# Altium PCB project_konovalov_motor_driver.PcbDoc
Units mm, origin at the board's own origin, x right, y up, seen from the top; angles counter-clockwise.
Board outline 25 x 62.5 mm, 2 copper layers (Top Layer, Bottom Layer), stack 1.57 mm thick; 36 components, 45 nets, 171 pads, 120 vias.
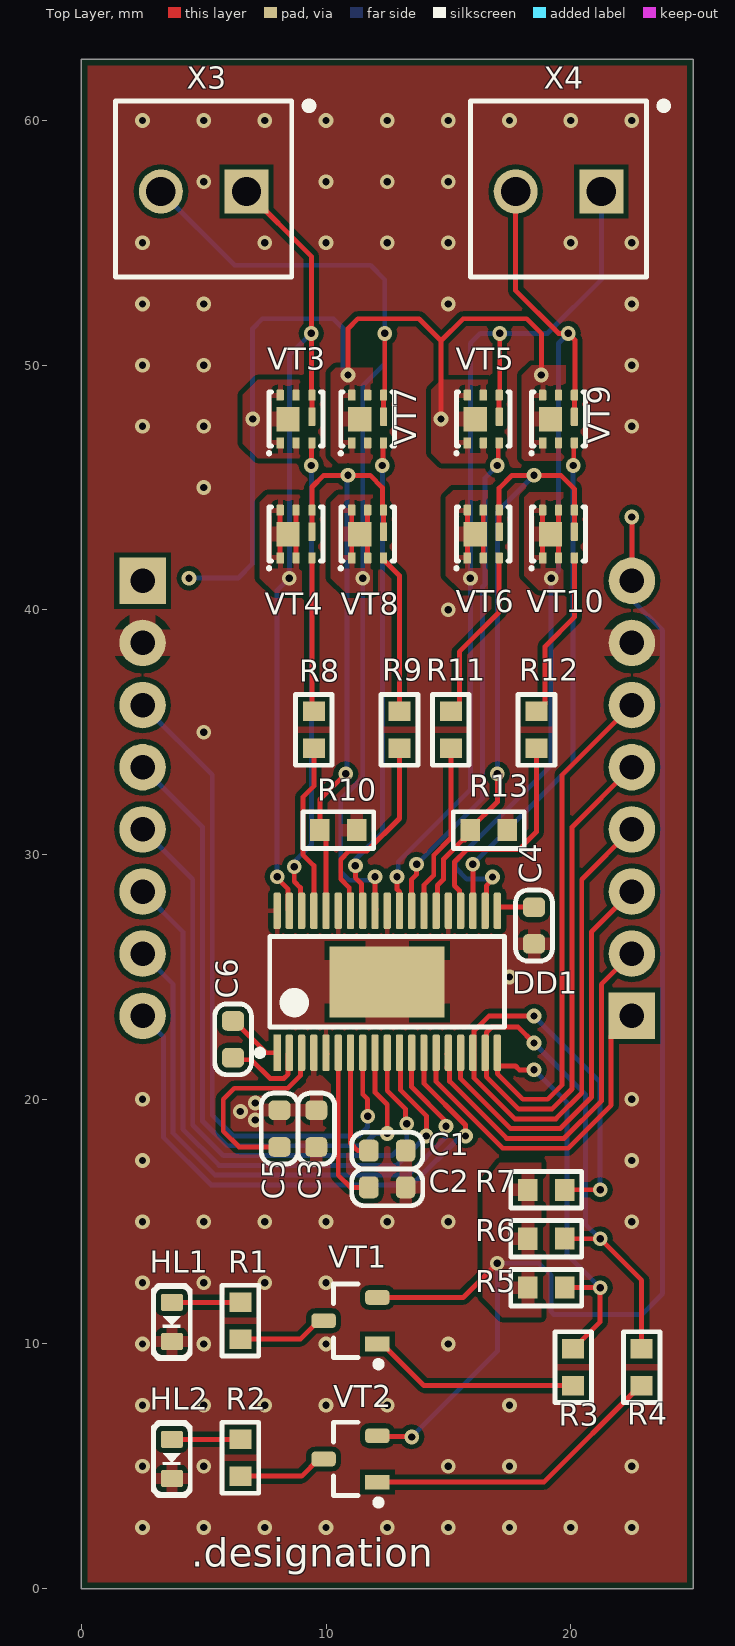
[diagram p0: Top Layer view]
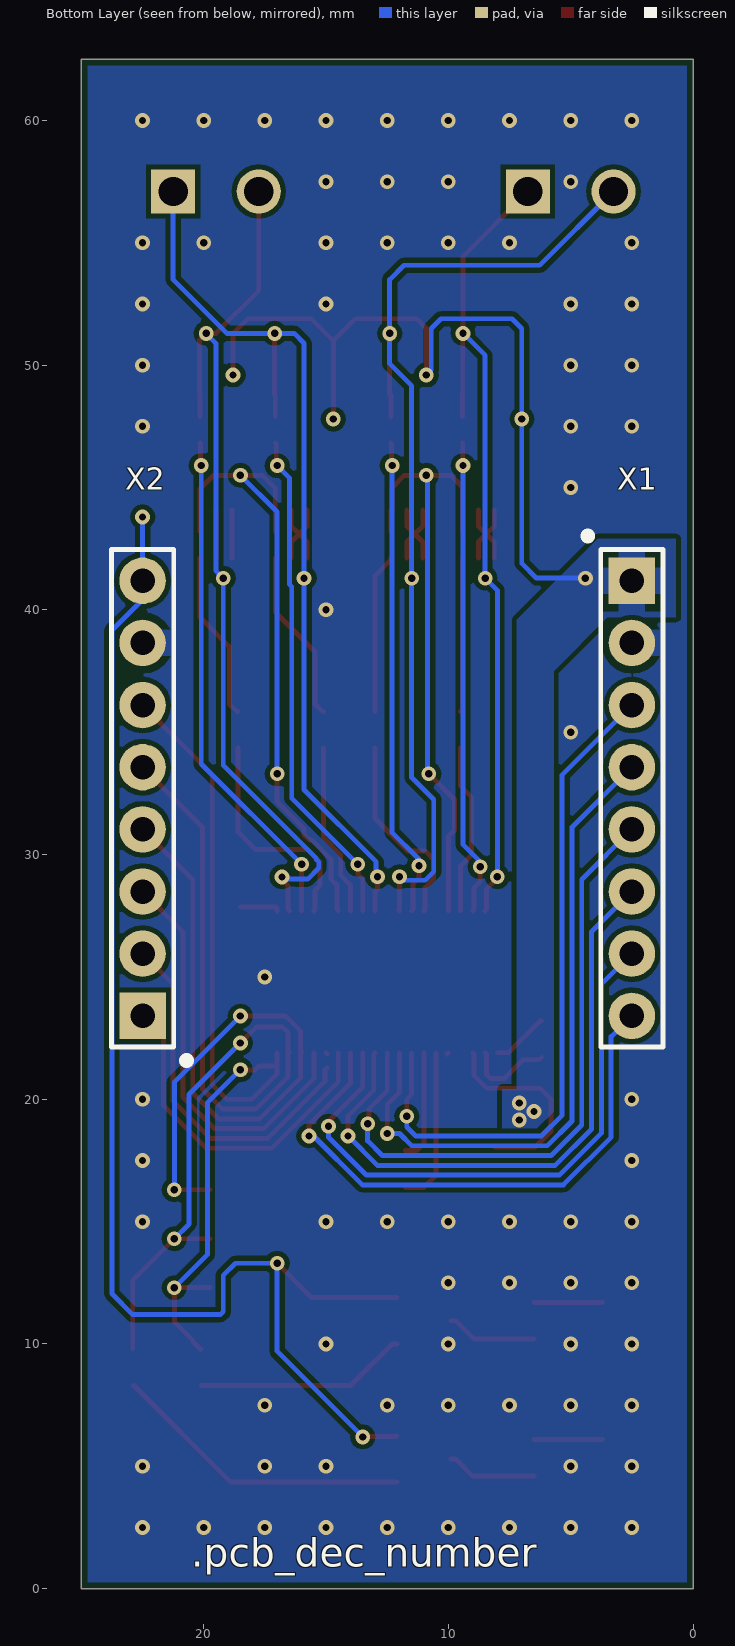
[diagram p1: Bottom Layer view, seen from below]
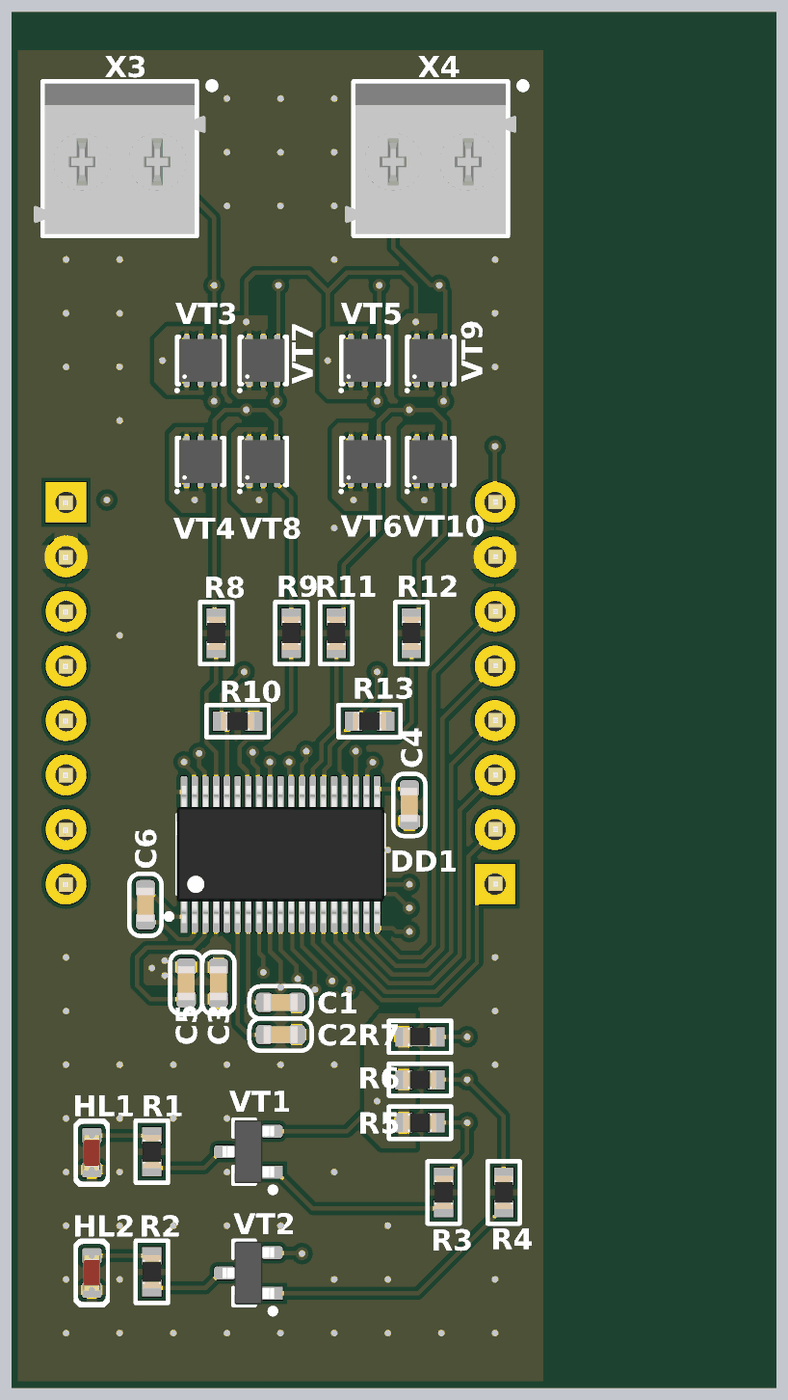
[diagram p2: 3D render of the assembled board from above, using the file's embedded part models]

## Layer stack, top to bottom
Top Solder: solder mask 0.0102, Solder Resist, Dk 3.5
Top Layer: signal copper 0.035
Core 1: core 1.5, FR4, Dk 4.6
Bottom Layer: signal copper 0.035
Bottom Solder: solder mask 0.0102, Solder Resist, Dk 3.5

## Board outline
0,62.5 25,62.5 25,0 0,0
cut-out: 0,64
cut-out: 35.6,56.5

## Design rules (kind name [scope] priority, off if disabled: settings)
AcuteAngle min_acute_angle [OnCopper] p1: minimum=3.50000000000000E+0001 checktracksonly=FALSE // Минимальный угол между примитивами топологии
BoardOutlineClearance board_outline_clearance_std [NOT (OnLayer('Bottom Overlay') OR OnLayer('Top Overlay'))] p1: gap=0.25 ignorepadtopadclearanceinfootprint=FALSE except(0: Arc-SplitContinuation Track-SplitContinuation SMDPad-SplitContinuation THPad-SplitContinuation Via-SplitContinuation Fill-SplitContinuation Poly-SplitContinuation Region-SplitContinuation Text-SplitContinuation) // Отступ элементов топологии от края фрезеруемой печатной платы
Clearance clearance_outer_35um_std [OnTopLayer OR OnBottomLayer] p1: gap=0.2 ignorepadtopadclearanceinfootprint=TRUE except(0.25: Arc-Hole Track-Hole SMDPad-Hole THPad-Hole Via-Hole Fill-Hole Poly-Hole Region-Hole Text-Hole) // Зазоры на внешних слоях
Clearance clearance_inner_35um_std [NOT (OnTopLayer Or OnBottomLayer)] p2: gap=0.2 ignorepadtopadclearanceinfootprint=FALSE except(0.25: Arc-Hole Track-Hole SMDPad-Hole THPad-Hole Via-Hole Fill-Hole Poly-Hole Region-Hole Text-Hole) // Зазоры на внутренних слоях
ComponentClearance [All] p1: gap=0 collisioncheckmode=3 verticalgap=0 showdistances=FALSE
DiffPairsRouting diff_pairs_routing [All] p1: maxlimit=0.127 minlimit=0.127 mostfreqgap=0.127 toplayer_minwidth=0.143 toplayer_maxwidth=0.143 toplayer_prefwidth=0.143 bottomlayer_minwidth=0.143 bottomlayer_maxwidth=0.143 bottomlayer_prefwidth=0.143 impedanceprofiledriven=TRUE impedanceprofileid={FD46899E-B5A2-4EF5-A302-5D2DB6A51F35} maxuncoupledlength=12.7 // Правила трассировки дифференциальных пар
HoleSize min_hole_size_std [IsPad] p1: absolutevalues=TRUE maxlimit=5.9 minlimit=0.6 maxpercent=80.000 minpercent=20.000 // Диаметр межслойного переходного отверстия
HoleSize min_hole_size_via_std [IsVia] p2: absolutevalues=TRUE maxlimit=5.9 minlimit=0.3 maxpercent=80.000 minpercent=20.000 // Минимальный диаметр монтажного отверстия
HoleToHoleClearance hole_to_hole_clearance_std [All] p1: gap=0.2 allowstackedmicrovias=FALSE // Минимальное расстояние между краями двух отверстий
MinimumAnnularRing min_via_ar_std [All] p1: minimumring=0.15 // Поясок площадки переходного отверстия (Annular ring VIA)
MinimumAnnularRing min_pad_ar_std [All] p2: minimumring=0.2 // Поясок монтажной контактной площадки (Annular ring PAD)
MinimumSolderMaskSliver min_solder_mask_bridge_std [All] p1: minsoldermaskwidth=0.15 // Мнимальная ширина масочного мостика
PlaneClearance plane_clearance_35um_std [All] p1: clearance=0.2 // Отступ полигона (для слоя plane) от элементов топологии
PlaneConnect [All] p1: planeconnectstyle=Relief reliefexpansion=0.5 reliefentries=4 reliefconductorwidth=0.2 reliefairgap=0.2
PolygonConnect poly_connect_to_pad<=0.3 [(AsMM(PadXSize_AllLayers)<=0.301) or (AsMM(PadYSize_AllLayers)<=0.301)] p1: thpad.connectstyle=Relief thpad.reliefconductorwidth=0.2 thpad.reliefentries=4 thpad.polygonreliefangle="90 Angle" thpad.airgapwidth=0.2 smdpad.connectstyle=Relief smdpad.reliefconductorwidth=0.2 smdpad.reliefentries=4 smdpad.polygonreliefangle="90 Angle" smdpad.airgapwidth=0.2 via.connectstyle=Direct via.reliefconductorwidth=0.254 via.reliefentries=4 via.polygonreliefangle="90 Angle" via.airgapwidth=0.254 // Правила подключения полигонов для падов от 0,3мм и меньше
PolygonConnect poly_connect_to_pad<=0.4 [(AsMM(PadXSize_AllLayers)<=0.401) or (AsMM(PadYSize_AllLayers)<=0.401)] p2: thpad.connectstyle=Relief thpad.reliefconductorwidth=0.26 thpad.reliefentries=4 thpad.polygonreliefangle="90 Angle" thpad.airgapwidth=0.2 smdpad.connectstyle=Relief smdpad.reliefconductorwidth=0.26 smdpad.reliefentries=4 smdpad.polygonreliefangle="90 Angle" smdpad.airgapwidth=0.2 via.connectstyle=Direct via.reliefconductorwidth=0.254 via.reliefentries=4 via.polygonreliefangle="90 Angle" via.airgapwidth=0.254 // Правила подключения полигонов для падов от 0,4 и меньше
PolygonConnect poly_connect_to_pad<=0.6 [(AsMM(PadXSize_AllLayers)<=0.601) or (AsMM(PadYSize_AllLayers)<=0.601)] p3: thpad.connectstyle=Relief thpad.reliefconductorwidth=0.33 thpad.reliefentries=4 thpad.polygonreliefangle="90 Angle" thpad.airgapwidth=0.2 smdpad.connectstyle=Relief smdpad.reliefconductorwidth=0.33 smdpad.reliefentries=4 smdpad.polygonreliefangle="90 Angle" smdpad.airgapwidth=0.2 via.connectstyle=Direct via.reliefconductorwidth=0.254 via.reliefentries=4 via.polygonreliefangle="90 Angle" via.airgapwidth=0.254 // Правила подключения полигонов для падов от 0,6мм и меньше
PolygonConnect poly_connect_to_pad<=0.7 [(AsMM(PadXSize_AllLayers)<=0.701) or (AsMM(PadYSize_AllLayers)<=0.701)] p4: thpad.connectstyle=Relief thpad.reliefconductorwidth=0.46 thpad.reliefentries=4 thpad.polygonreliefangle="90 Angle" thpad.airgapwidth=0.2 smdpad.connectstyle=Relief smdpad.reliefconductorwidth=0.46 smdpad.reliefentries=4 smdpad.polygonreliefangle="90 Angle" smdpad.airgapwidth=0.2 via.connectstyle=Direct via.reliefconductorwidth=0.254 via.reliefentries=4 via.polygonreliefangle="90 Angle" via.airgapwidth=0.254 // Правила подключения полигонов для падов от 0,7мм и меньше
PolygonConnect poly_connect_to_pad<=0.8 [(AsMM(PadXSize_AllLayers)<=0.8)or(AsMM(PadYSize_AllLayers)<=0.8)] p5: thpad.connectstyle=Relief thpad.reliefconductorwidth=0.53 thpad.reliefentries=4 thpad.polygonreliefangle="90 Angle" thpad.airgapwidth=0.3 smdpad.connectstyle=Relief smdpad.reliefconductorwidth=0.53 smdpad.reliefentries=4 smdpad.polygonreliefangle="90 Angle" smdpad.airgapwidth=0.2 via.connectstyle=Direct via.reliefconductorwidth=0.254 via.reliefentries=4 via.polygonreliefangle="90 Angle" via.airgapwidth=0.254 // Правила подключения полигонов для падов от 0,8мм и меньше
PolygonConnect poly_connect_to_pad<=1 [(AsMM(PadXSize_AllLayers)<=1.01)or(AsMM(PadYSize_AllLayers)<=1.01)] p6: thpad.connectstyle=Relief thpad.reliefconductorwidth=0.6 thpad.reliefentries=4 thpad.polygonreliefangle="90 Angle" thpad.airgapwidth=0.3 smdpad.connectstyle=Relief smdpad.reliefconductorwidth=0.6 smdpad.reliefentries=4 smdpad.polygonreliefangle="90 Angle" smdpad.airgapwidth=0.2 via.connectstyle=Direct via.reliefconductorwidth=0.254 via.reliefentries=4 via.polygonreliefangle="90 Angle" via.airgapwidth=0.254 // Правила подключения полигонов для падов от 1мм и меньше
PolygonConnect poly_connect_to_pad<=1.3 [(AsMM(PadXSize_AllLayers)<=1.31)or(AsMM(PadYSize_AllLayers)<=1.31)] p7: thpad.connectstyle=Relief thpad.reliefconductorwidth=0.66 thpad.reliefentries=4 thpad.polygonreliefangle="90 Angle" thpad.airgapwidth=0.3 smdpad.connectstyle=Relief smdpad.reliefconductorwidth=0.86 smdpad.reliefentries=4 smdpad.polygonreliefangle="90 Angle" smdpad.airgapwidth=0.2 via.connectstyle=Direct via.reliefconductorwidth=0.254 via.reliefentries=4 via.polygonreliefangle="90 Angle" via.airgapwidth=0.254 // Правила подключения полигонов для падов от 1,3мм и меньше
PolygonConnect poly_connect_to_pad<=1.6 [(AsMM(PadXSize_AllLayers)<=1.61)or(AsMM(PadYSize_AllLayers)<=1.61)] p8: thpad.connectstyle=Relief thpad.reliefconductorwidth=0.8 thpad.reliefentries=4 thpad.polygonreliefangle="90 Angle" thpad.airgapwidth=0.3 smdpad.connectstyle=Relief smdpad.reliefconductorwidth=1 smdpad.reliefentries=4 smdpad.polygonreliefangle="90 Angle" smdpad.airgapwidth=0.2 via.connectstyle=Direct via.reliefconductorwidth=0.254 via.reliefentries=4 via.polygonreliefangle="90 Angle" via.airgapwidth=0.254 // Правила подключения полигонов для падов от 1,6мм и меньше
PolygonConnect poly_connect_to_pad<=1.8 [(AsMM(PadXSize_AllLayers)<=1.8)or(AsMM(PadYSize_AllLayers)<=1.8)] p9: thpad.connectstyle=Relief thpad.reliefconductorwidth=1 thpad.reliefentries=4 thpad.polygonreliefangle="90 Angle" thpad.airgapwidth=0.3 smdpad.connectstyle=Relief smdpad.reliefconductorwidth=1.2 smdpad.reliefentries=4 smdpad.polygonreliefangle="90 Angle" smdpad.airgapwidth=0.2 via.connectstyle=Direct via.reliefconductorwidth=0.254 via.reliefentries=4 via.polygonreliefangle="90 Angle" via.airgapwidth=0.254 // Правила подключения полигонов для падов от 1,8мм и меньше
PolygonConnect poly_connect_to_pad<=2 [(AsMM(PadXSize_AllLayers)<=2.01)or(AsMM(PadYSize_AllLayers)<=2.01)] p10: thpad.connectstyle=Relief thpad.reliefconductorwidth=1.1 thpad.reliefentries=4 thpad.polygonreliefangle="90 Angle" thpad.airgapwidth=0.3 smdpad.connectstyle=Relief smdpad.reliefconductorwidth=1.4 smdpad.reliefentries=4 smdpad.polygonreliefangle="90 Angle" smdpad.airgapwidth=0.2 via.connectstyle=Direct via.reliefconductorwidth=0.254 via.reliefentries=4 via.polygonreliefangle="90 Angle" via.airgapwidth=0.254 // Правила подключения полигонов для падов от 2мм и меньше
PolygonConnect poly_connect_to_pad<=2.3 [(AsMM(PadXSize_AllLayers)<=2.31)or(AsMM(PadYSize_AllLayers)<=2.31)] p11: thpad.connectstyle=Relief thpad.reliefconductorwidth=1.2 thpad.reliefentries=4 thpad.polygonreliefangle="90 Angle" thpad.airgapwidth=0.3 smdpad.connectstyle=Relief smdpad.reliefconductorwidth=1.4 smdpad.reliefentries=4 smdpad.polygonreliefangle="90 Angle" smdpad.airgapwidth=0.2 via.connectstyle=Direct via.reliefconductorwidth=0.254 via.reliefentries=4 via.polygonreliefangle="90 Angle" via.airgapwidth=0.254 // Правила подключения полигонов для падов от 2,3мм и меньше
PolygonConnect poly_connect_to_pad<=2.5 [(AsMM(PadXSize_AllLayers)<=2.51)or(AsMM(PadYSize_AllLayers)<=2.51)] p12: thpad.connectstyle=Relief thpad.reliefconductorwidth=1.2 thpad.reliefentries=4 thpad.polygonreliefangle="90 Angle" thpad.airgapwidth=0.3 smdpad.connectstyle=Relief smdpad.reliefconductorwidth=1.4 smdpad.reliefentries=4 smdpad.polygonreliefangle="90 Angle" smdpad.airgapwidth=0.2 via.connectstyle=Direct via.reliefconductorwidth=0.254 via.reliefentries=4 via.polygonreliefangle="90 Angle" via.airgapwidth=0.254 // Правила подключения полигонов для падов от 2,5мм и меньше
PolygonConnect poly_connect_to_pad<=2.7 [(AsMM(PadXSize_AllLayers)<=2.71)or(AsMM(PadYSize_AllLayers)<=2.71)] p13: thpad.connectstyle=Relief thpad.reliefconductorwidth=1.4 thpad.reliefentries=4 thpad.polygonreliefangle="90 Angle" thpad.airgapwidth=0.3 smdpad.connectstyle=Relief smdpad.reliefconductorwidth=1.6 smdpad.reliefentries=4 smdpad.polygonreliefangle="90 Angle" smdpad.airgapwidth=0.2 via.connectstyle=Direct via.reliefconductorwidth=0.254 via.reliefentries=4 via.polygonreliefangle="90 Angle" via.airgapwidth=0.254 // Правила подключения полигонов для падов от 2,7мм и меньше
PolygonConnect poly_connect_to_pad<=3 [(AsMM(PadXSize_AllLayers)<=3.01)or(AsMM(PadYSize_AllLayers)<=3.01)] p14: thpad.connectstyle=Relief thpad.reliefconductorwidth=1.6 thpad.reliefentries=4 thpad.polygonreliefangle="90 Angle" thpad.airgapwidth=0.3 smdpad.connectstyle=Relief smdpad.reliefconductorwidth=1.8 smdpad.reliefentries=4 smdpad.polygonreliefangle="90 Angle" smdpad.airgapwidth=0.2 via.connectstyle=Direct via.reliefconductorwidth=0.254 via.reliefentries=4 via.polygonreliefangle="90 Angle" via.airgapwidth=0.254 // Правила подключения полигонов для падов от 3мм и меньше
PolygonConnect poly_connect_to_pad<=7 [(AsMM(PadXSize_AllLayers)<7.01)or(AsMM(PadYSize_AllLayers)<=7.01)] p15: thpad.connectstyle=Relief thpad.reliefconductorwidth=2 thpad.reliefentries=4 thpad.polygonreliefangle="90 Angle" thpad.airgapwidth=0.4 smdpad.connectstyle=Relief smdpad.reliefconductorwidth=2 smdpad.reliefentries=4 smdpad.polygonreliefangle="90 Angle" smdpad.airgapwidth=0.3 via.connectstyle=Direct via.reliefconductorwidth=0.254 via.reliefentries=4 via.polygonreliefangle="90 Angle" via.airgapwidth=0.254 // Правила подключения полигонов для падов от 7мм и меньше
PolygonConnect poly_connect_to_pad [All] p16: thpad.connectstyle=Relief thpad.reliefconductorwidth=0.25 thpad.reliefentries=4 thpad.polygonreliefangle="90 Angle" thpad.airgapwidth=0.2 smdpad.connectstyle=Relief smdpad.reliefconductorwidth=0.25 smdpad.reliefentries=4 smdpad.polygonreliefangle="90 Angle" smdpad.airgapwidth=0.2 via.connectstyle=Direct via.reliefconductorwidth=0.25 via.reliefentries=4 via.polygonreliefangle="90 Angle" via.airgapwidth=0.2 // Правила подключения полигонов общие
RoutingCorners [All] p1 off: cornerstyle=45-Degree minsetback=2.5 maxsetback=2.5
RoutingVias [All] p1: holewidth=0.3 width=0.6 viastyle="Through Hole" minholewidth=0.3 minwidth=0.6 maxholewidth=5.9 maxwidth=6.4
SilkToSilkClearance silk_to_silk_clearance_std [All] p1 off: silktosilkclearance=0.15 // Отступ текста шелкографии от других примитивов шелкографии
SilkToSolderMaskClearance silk_to_solder_mask_clearance_std [IsPad] p1 off: minsilkscreentomaskgap=0.15 clearancetoexposedcopper=FALSE // Минимальное расстояние между элементами шелкографии и вскрытой медью
SolderMaskExpansion solder_mask_expansion_std [All] p1: expansion=0.05 // Припуск паяльной масски
UnRoutedNet [All] p1: checkbadconnections=TRUE
Width width_35um_std [All] p1: maxlimit=10 minlimit=0.2 preferedwidth=0.2 checkconnectedcopper=TRUE // Ширина проводников (общая)
19 further rules are at their usual default settings.

## Components (designator, comment, footprint, x,y, rotation, side; value= is the part's Value field where it differs from the comment)
C1 "1 мк" C0603 12.5,17.9 r0 top
C2 "0,1 мк" C0603 12.5,16.4 r0 top
C3 "0,01 мк" C0603 9.6,18.8 r270 top
C4 "1000" C0603 18.5,27.1 r270 top
C5 "1 мк" C0603 8.1,18.8 r270 top
C6 "0,1 мк" C0603 6.2,22.45 r270 top
DD1 "DRV8711DCP" HTSSOP-38-P50-470X290X120-L63X22-T470X290 12.5,24.8 r90 top
HL1 "TLMO1000-GS08" HL0603 3.7,10.9 r90 top
HL2 "TLMY1000-GS08" HL0603 3.7,5.3 r90 top
R1 "100" R0603 6.5,10.95 r270 top
R2 "100" R0603 6.5,5.35 r270 top
R3 "100" R0603 20.1,9.05 r90 top
R4 "100" R0603 22.9,9.05 r90 top
R5 "10 к" R0603 19,12.3 r180 top
R6 "10 к" R0603 19,14.3 r180 top
R7 "10 к" R0603 19,16.3 r180 top
R8 "100" R0603 9.5,35.1 r90 top
R9 "100" R0603 13,35.1 r90 top
R10 "0,05" R0603 10.5,31 r180 top
R11 "100" R0603 15.1,35.1 r90 top
R12 "100" R0603 18.6,35.1 r90 top
R13 "0,05" R0603 16.65,31 r180 top
VT1 "Si2323DS-T1-GE3" SOT-23-3-P95-292X237X112 11,10.95 r180 top
VT2 "Si2323DS-T1-GE3" SOT-23-3-P95-292X237X112 11,5.3 r180 top
VT3 "CSD17318Q2T" WSON-6-P65-200X200X80 8.775,47.8 r90 top
VT4 "CSD17318Q2T" WSON-6-P65-200X200X80 8.775,43.1 r90 top
VT5 "CSD17318Q2T" WSON-6-P65-200X200X80 16.425,47.8 r90 top
VT6 "CSD17318Q2T" WSON-6-P65-200X200X80 16.425,43.1 r90 top
VT7 "CSD17318Q2T" WSON-6-P65-200X200X80 11.7,47.8 r90 top
VT8 "CSD17318Q2T" WSON-6-P65-200X200X80 11.7,43.1 r90 top
VT9 "CSD17318Q2T" WSON-6-P65-200X200X80 19.5,47.8 r90 top
VT10 "CSD17318Q2T" WSON-6-P65-200X200X80 19.5,43.1 r90 top
X1 "DS1021-1x8SF11-B" DS1021-1X8SF11-B 2.5,32.3 r270 bottom
X2 "DS1021-1x8SF11-B" DS1021-1X8SF11-B 22.5,32.3 r90 bottom
X3 "1776275-2" 1776275-2 5,57.2 r180 top
X4 "1776275-2" 1776275-2 19.5,57.2 r180 top

## Footprints (in the part's own frame and the unit in brackets; to place one, negate y for a bottom-side part, rotate by r counter-clockwise, add the part's x,y. Pads: shape width x height; smd on the part's side, far side on the other; paste and mask are expansions set on the pad)
1776275-2 [mm] "PCB Terminal Blocks, Header, Wire-to-Board, 2 Pins, 3.5mm, 1 Row, Side Wire Entry Angle, 26 – 18AWG Wire Size"
  rect 1.8x1.8 hole 1.2: 1(-1.75,0.1)
  round 1.8 hole 1.2: 2(1.75,0.1)
  silkscreen extent -4.3,-3.6 3.6,3.6, body extent -4,-3.5 4,3.5, height 8.3
C0603 [mm] "Chip Capacitor, 2-Leads, Body 1,60x0,80mm, IPC Medium Density"
  rrect50% 0.8x0.9 smd: 1(-0.75,0) 2(0.75,0)
  silkscreen extent -1.45,-0.75 1.45,0.75, body extent -0.8,-0.4 0.8,0.4, height 0.8
DS1021-1X8SF11-B [mm] "PLS 8 Pins 2,54mm Plug Header V/T Type"
  rect 1.9x1.9 hole 1: 1(-8.89,0)
  round 1.9 hole 1: 2(-6.35,0) 3(-3.81,0) 4(-1.27,0) 5(1.27,0) 6(3.81,0) 7(6.35,0) 8(8.89,0)
  silkscreen extent -10.72,-1.8 10.17,1.28, body extent -10.16,-1.28 10.16,1.26, height 9.2
HL0603 [mm] "Chip Resistor, 2-Leads, Body 1,60x0,80mm, IPC Medium Density"
  rrect25% 0.7x0.9 smd: 1(-0.8,0) 2(0.8,0)
  silkscreen extent -1.5,-0.75 1.5,0.75, body extent -0.81,-0.4 0.81,0.4, height 0.64
HTSSOP-38-P50-470X290X120-L63X22-T470X290 [mm] "HTSSOP, 38-Leads, Body 9,50x4,40mm, Pitch 0,50mm, Thermal Pad 4,70x2,90mm, IPC Medium Density"
  rect 2.9x4.7 smd: 0(0,0)
  rect 1.5x0.3 smd: 1(-2.9,4.5)
  rrect50% 1.5x0.3 smd: 2(-2.9,4) 3(-2.9,3.5) 4(-2.9,3) 5(-2.9,2.5) 6(-2.9,2) 7(-2.9,1.5) 8(-2.9,1) 9(-2.9,0.5) 10(-2.9,0) 11(-2.9,-0.5) 12(-2.9,-1) 13(-2.9,-1.5) 14(-2.9,-2) 15(-2.9,-2.5) 16(-2.9,-3) 17(-2.9,-3.5) 18(-2.9,-4) 19(-2.9,-4.5) 20(2.9,-4.5) 21(2.9,-4) 22(2.9,-3.5) 23(2.9,-3) 24(2.9,-2.5) 25(2.9,-2) 26(2.9,-1.5) 27(2.9,-1) 28(2.9,-0.5) 29(2.9,0) 30(2.9,0.5) 31(2.9,1) 32(2.9,1.5) 33(2.9,2) 34(2.9,2.5) 35(2.9,3) 36(2.9,3.5) 37(2.9,4) 38(2.9,4.5)
  silkscreen extent -3.02,-4.8 1.85,5.32, body extent -3.2,-4.85 3.2,4.85, height 1.09
R0603 [mm] "Chip Resistor, 2-Leads, Body 1,60x0,80mm, IPC Medium Density"
  rect 0.8x0.9 smd: 1(-0.75,0) 2(0.75,0)
  silkscreen extent -1.45,-0.75 1.45,0.75, body extent -0.77,-0.43 0.78,0.43, height 0.43
SOT-23-3-P95-292X237X112 [mm] "SOT-23, 3-Leads, Body 2,92x2,37mm, Pitch 0,95mm, IPC Medium Density"
  rrect50% 1x0.6 smd: D(1.1,0) S(-1.1,-0.95)
  rect 1x0.6 smd: G(-1.1,0.95)
  silkscreen extent -1.27,-1.5 0.7,1.9, body extent -1.2,-1.46 1.2,1.46, height 1.2
WSON-6-P65-200X200X80 [mm] "WSON, 6-Leads, Body 2,00x2,00mm, Pitch 0,65mm, Thermal Pad 1,00x0,95mm, IPC Medium Density"
  rrect25% 0.45x0.3 smd paste-0.002: D(-0.975,0) D(0.975,0) D(0.975,0.65) G(-0.975,-0.65) S(0.975,-0.65)
  rect 0.45x0.3 smd paste-0.002: D(-0.975,0.65)
  rect 1x0.95 smd paste-10: D(0,0.325)
  rrect25% 0.75x0.3 smd paste-0.002: S(0.095,-0.65)
  silkscreen extent -1.4,-1.1 1.1,1.1, body extent -1,-1 1,1, height 0.8

## Part data
C1 C5: library part c0119, "=Описание", HelpURL=https://www.yageo.com/upload/media/product/productsearch/datasheet/mlcc/UPY-GPHC_X7R_6.3V-to-50V_20.pdf, ID=c0119, Корпус=0603, Наименование=CC0603KRX7R9BB105, Напряжение="50 В", Номинал="1 мк", Номинальное напряжение="50 В", Описание="Конденсатор керамический чип 0603 1 мкФ 50 В ±10 %", Отклонение="±10 %", Производитель="YAGEO Corp.", Рабочие температуры="от –55 °С до +125 °С", Температурный коэффициент емкости=X7R, Фамилия=Паньков
C2: library part c0088, "=Описание", HelpURL=https://www.yageo.com/upload/media/product/productsearch/datasheet/mlcc/UPY-GPHC_X7R_6.3V-to-50V_20.pdf, ID=c0088, Корпус=0603, Наименование=CC0603KRX7R9BB104, Напряжение="50 В", Номинал="0,1 мк", Номинальное напряжение="50 В", Описание="Конденсатор керамический чип 0603 100 нФ 50 В ±10 %", Отклонение="±10 %", Производитель="YAGEO Corp.", Рабочие температуры="от –55 °С до +125 °С", Температурный коэффициент емкости=X7R, Фамилия=Паньков
C3: library part c0036, "=Описание", HelpURL=https://www.yageo.com/upload/media/product/productsearch/datasheet/mlcc/UPY-GPHC_X7R_6.3V-to-50V_20.pdf, ID=c0036, Корпус=0603, Наименование=CC0603KRX7R9BB103, Напряжение="50 В", Номинал="0,01 мк", Номинальное напряжение="50 В", Описание="Конденсатор керамический чип 0603 10 нФ 50 В ±10 %", Отклонение="±10 %", Производитель="YAGEO Corp.", Рабочие температуры="от –55 °С до +125 °С", Температурный коэффициент емкости=X7R, Фамилия=Паньков
C4: library part c0038, "=Описание", HelpURL=https://www.yageo.com/upload/media/product/productsearch/datasheet/mlcc/UPY-GPHC_X7R_6.3V-to-50V_20.pdf, ID=c0038, Корпус=0603, Наименование=CC0603KRX7R9BB102, Напряжение="50 В", Номинал=1000, Номинальное напряжение="50 В", Описание="Конденсатор керамический чип 0603 1 нФ 50 В ±10 %", Отклонение="±10 %", Производитель="YAGEO Corp.", Рабочие температуры="от –55 °С до +125 °С", Температурный коэффициент емкости=X7R, Фамилия=Паньков
C6: library part c0060, "=Описание", HelpURL=https://www.yageo.com/upload/media/product/productsearch/datasheet/mlcc/UPY-GPHC_X7R_6.3V-to-50V_20.pdf, ID=c0060, Корпус=0603, Наименование=CC0603JRX7R9BB104, Напряжение="50 В", Номинал="0,1 мк", Номинальное напряжение="50 В", Описание="Конденсатор керамический чип 0603 100 нФ 50 В ±5 %", Отклонение="±5 %", Производитель="YAGEO Corp.", Рабочие температуры="от –55 °С до +125 °С", Температурный коэффициент емкости=X7R, Фамилия=Ларионов
DD1: library part dd0001, "=Описание", HelpURL=https://www.ti.com/product/DRV8711, ID=dd0001, Выходное напряжение="5 В", Корпус=HTSSOP-38, Наименование=DRV8711DCP, Описание="Драйвер биполярного шагового двигателя 1…256 микрошагов 52 В", Производитель="Texas Instruments Inc.", Рабочее напряжение="от 8 В до 52 В", Рабочие температуры="от –40 °С до +85 °С", Рабочий ток="17 мА", Фамилия=Паньков
HL1: library part hl0002, "=Описание", HelpURL=https://www.vishay.com/leds/list/product-83172/, ID=hl0002, Корпус=0603, Наименование=TLMO1000-GS08, Номинальная длина волны="605 нм", Номинальная сила света="7,5 мкд", Номинальное падение напряжения="1,8 В", Номинальный прямой ток="15 мА", Описание="Светодиод чип 0603 светло-оранжевый", Производитель="Vishay Intertechnology, Inc.", Рабочие температуры="от –40 °С до +100 °С", Рассеиваемая мощность="40 мВт", Фамилия=Ларионов, Цвет=Светло-оранжевый
HL2: library part hl0003, "=Описание", HelpURL=https://www.vishay.com/leds/list/product-83172/, ID=hl0003, Корпус=0603, Наименование=TLMY1000-GS08, Номинальная длина волны="588 нм", Номинальная сила света="7,5 мкд", Номинальное падение напряжения="1,8 В", Номинальный прямой ток="15 мА", Описание="Светодиод чип 0603 желтый", Производитель="Vishay Intertechnology, Inc.", Рабочие температуры="от –40 °С до +100 °С", Рассеиваемая мощность="40 мВт", Фамилия=Ларионов, Цвет=Желтый
R1 R2 R3 R4 R8 R9 R11 R12: library part r0007, "=Описание", HelpURL=https://www.yageo.com/upload/media/product/productsearch/datasheet/rchip/PYu-RC_Group_51_RoHS_L_11.pdf, ID=r0007, Корпус=0603, Наименование=RC0603FR??07100RL, Номинал=100, Номинальное напряжение="75 В", Номинальный ток="1 А", Описание="Резистор чип 0603 100 Ом ±1 % 0,1 Вт", Отклонение="±1 %", Примечание="Ряд E24", Производитель="YAGEO Corp.", Рабочие температуры="от –55 °С до +155 °С", Фамилия=Самарин
R5 R6 R7: library part r0060, "=Описание", HelpURL=https://www.yageo.com/upload/media/product/productsearch/datasheet/rchip/PYu-RC_Group_51_RoHS_L_11.pdf, ID=r0060, Корпус=0603, Наименование=RC0603FR-0710KL, Номинал="10 к", Номинальное напряжение="75 В", Номинальный ток="1 А", Описание="Резистор чип 0603 10 кОм ±1 % 0,1 Вт", Отклонение="±1 %", Примечание="Ряд E24", Производитель="YAGEO Corp.", Рабочие температуры="от –55 °С до +155 °С", Фамилия=Самарин
R10 R13: library part r0002, "=Описание", HelpURL=https://www.yageo.com/upload/media/product/productsearch/datasheet/rchip/PYu-RL_Group_521_RoHS_L_2.pdf, ID=r0002, Корпус=0603, Наименование=RL0603FR-070R05L, Номинал=0,05, Номинальное напряжение="не указано", Номинальный ток="2 А", Описание="Резистор чип 0603 50 мОм ±1 % 0,1 Вт", Отклонение="±1 %", Производитель="YAGEO Corp.", Рабочие температуры="от –55 °С до +155 °С", Фамилия=Ларионов
VT1 VT2: library part vt0007, "=Описание", HelpURL=https://www.vishay.com/ppg?72024, ID=vt0007, Корпус=SOT-23-3, Наименование=Si2323DS-T1-GE3, Напряжение затвор — исток="±8 В", Напряжение сток — исток="–20 В", Описание="Полевой P-канальный МДП-транзистор 20 В 4,7 А", Производитель="Vishay Intertechnology, Inc.", Рабочие температуры="от –55 °С до +150 °С", Сопротивление сток — исток="68 мОм", Ток стока="4,7 А", Фамилия=Засецкий
VT3 VT4 VT5 VT6 VT7 VT8 VT9 VT10: library part vt0003, "=Описание", HelpURL=https://www.ti.com/product/CSD17318Q2, ID=vt0003, Корпус=WSON-6, Наименование=CSD17318Q2T, Напряжение затвор — исток="±10 В", Напряжение сток — исток="30 В", Описание="Полевой N-канальный МДП-транзистор 30 В 10 А", Производитель="Texas Instruments Inc.", Рабочие температуры="от –55 °С до +150 °С", Сопротивление сток — исток="20 мОм", Ток стока="10 А", Фамилия=Паньков
X1 X2: library part x0029, "=Описание", HelpURL=http://en.connfly.group/product/xVkr=EusQssAN0gN=Aos=mU+UrVkR9kqEAN0gN9g+WqANB+A, ID=x0029, Наименование=DS1021-1x8SF11-B, Описание="PLS 8 pin 2,54 мм вилка прямой", Производитель="Connfly Electronic Co., Ltd.", Фамилия=Паньков
  X1: Contact_1=+24V, Contact_2=GND, Contact_3=nSLEEP, Contact_4=RESET, Contact_5=STEP/AIN1, Contact_6=DIR/AIN2, Contact_7=BIN1, Contact_8=BIN2
  X2: Contact_1=SCK, Contact_2=MISO, Contact_3=nCS, Contact_4=MOSI, Contact_5=nFAULT, Contact_6=nSTALL, Contact_7=GND, Contact_8=+3,3V
X3 X4: library part x0008, "=Описание", HelpURL=https://www.te.com/usa-en/product-1776275-2.html, ID=x0008, Наименование=1776275-2, Описание="Terminal Block 2 pin 3,5 мм", Производитель="TE Connectivity", Фамилия=Паньков
  X3: Contact_1=AOUT1, Contact_2=AOUT2
  X4: Contact_1=BOUT1, Contact_2=BOUT2

## Via types
v1: diameter 0.6, hole 0.3, Top Layer to Bottom Layer, tented both sides, 120 vias

## Nets (pads, with @x,y where several pads share a name; then routed paths per layer and width w, separated by ;. In a path a pad name is that pad's centre, name@x,y a point inside that pad or via, vN(x,y) a via of type N, cw(c..) or ccw(c..) an arc to the next point about the centre after c; other vN are vias at no path point)
+3,3V: R5.2 R6.2 R7.2 VT1.S VT2.S X2.8 | length 59.2
  Top Layer w0.2: VT2.S 12.125,6.225 13.475,6.225 v1(13.5,6.2) ; VT1.S 15.6,11.9 v1(17,13.3) ; X2.8 v1(22.5,43.8)
  Bottom Layer w0.2: v1(13.5,6.2) 17,9.7 v1(17,13.3) 18.7,13.3 19.2,12.8 19.2,11.317 19.317,11.2 22.9,11.2 23.75,12.05 23.75,39.168 22.5,40.418 X2.8 v1(22.5,43.8)
+24V: C3.1 C5.1 DD1.4 VT3.D VT5.D VT7.D VT9.D X1.1 | length 34.3
  Top Layer w0.2: v1(10.9,49.6) 10.9,51.5 11.3,51.9 13.8,51.9 14.7,51 ; v1(14.7,47.8) 14.7,51 ; v1(18.8,49.6) 18.8,51.3 18.2,51.9 15.6,51.9 14.7,51
  Bottom Layer w0.2: v1(4.4,41.3) 6.4,41.3 7,41.9 v1(7,47.8) 7,51.5 7.4,51.9 10.3,51.9 10.7,51.5 10.7,49.8 v1(10.9,49.6)
  other v1: 7.1,19.15 6.5,19.5 7.1,19.85
AOUT1: DD1.37 VT3.S VT4.D X3.1 | length 39.1
  Top Layer w0.2: X3.1 9.4,54.45 v1(9.4,51.3) 9.413,51.287 9.413,48.787 9.425,48.775 VT3.S@9.425,47.895 ; v1(8,29.1) 8,29.034 8.45,28.584 8.45,27.75 DD1.37 ; VT4.D@8.125,42.125 8.125,42.775 VT4.D@8.45,43.1 ; VT4.D@8.125,44.075 8.125,43.425 VT4.D@8.45,43.1 ; VT4.D@8.775,42.125 8.775,42.775 VT4.D@8.45,43.1 ; VT4.D@8.775,44.075 8.775,43.425 VT4.D@8.45,43.1
  Bottom Layer w0.2: v1(8,29.1) 8,40.8 v1(8.5,41.3) 8.5,50.4 v1(9.4,51.3)
AOUT2: DD1.30 VT7.S VT8.D X3.2 | length 46.5
  Top Layer w0.2: VT8.D@11.05,42.125 11.05,42.775 VT8.D@11.375,43.1 ; VT8.D@11.05,44.075 11.05,43.425 VT8.D@11.375,43.1 ; VT8.D@11.7,42.125 11.7,42.775 VT8.D@11.375,43.1 ; VT8.D@11.7,44.075 11.7,43.425 VT8.D@11.375,43.1 ; DD1.30 12.05,27.75 12,27.8 v1(12,29.1) ; VT7.S@12.35,47.895 12.35,48.775 12.4,48.825 v1(12.4,51.3)
  Bottom Layer w0.2: X3.2 6.265,54.085 11.815,54.085 12.4,53.5 v1(12.4,51.3) 12.4,50.063 11.5,49.163 v1(11.5,41.3) 11.5,33.151 10.6,32.251 10.6,29.301 10.951,28.95 11.85,28.95 v1(12,29.1)
BIN1: DD1.12 X1.7 | length 24.4
  Top Layer w0.2: DD1.12 13.5,20.5 14.9,19.1 v1(14.9,18.9)
  Bottom Layer w0.2: X1.7 3.75,24.7 3.75,18.616 5.466,16.9 13.349,16.9 14.9,18.451 v1(14.9,18.9)
BIN2: DD1.13 X1.8 | length 23.4
  Top Layer w0.2: DD1.13 14,20.649 15.7,18.949 v1(15.7,18.5)
  Bottom Layer w0.2: X1.8 3.35,22.56 3.35,18.45 5.3,16.5 13.514,16.5 15.514,18.5 v1(15.7,18.5)
BOUT1: DD1.28 VT5.S VT6.D X4.1 | length 42.4
  Top Layer w0.2: v1(12.9,29.1) 12.9,28.58 13,28.48 DD1.28 ; VT6.D@15.775,42.125 15.775,42.775 VT6.D@16.1,43.1 ; VT6.D@15.775,44.075 15.775,43.425 VT6.D@16.1,43.1 ; VT6.D@16.425,42.125 16.425,42.775 VT6.D@16.1,43.1 ; VT6.D@16.425,44.075 16.425,43.425 VT6.D@16.1,43.1 ; VT5.S@17.075,47.895 17.075,48.775 17.1,48.8 v1(17.1,51.3)
  Bottom Layer w0.2: v1(12.9,29.1) 12.951,29.151 12.951,29.7 15.9,32.649 v1(15.9,41.3) 15.9,50.9 16.3,51.3 v1(17.1,51.3) 19.051,51.3 21.25,53.499 X4.1
BOUT2: DD1.21 VT9.S VT10.D X4.2 | length 41.3
  Top Layer w0.2: DD1.21 16.55,27.75 16.55,28.727 16.8,28.977 v1(16.8,29.086) ; X4.2 17.75,53.05 19.5,51.3 v1(19.9,51.3) 20.175,51.025 20.175,48.8 20.15,48.775 VT9.S@20.15,47.895 ; VT10.D@18.85,42.125 VT10.D@18.85,44.075 ; VT10.D@19.5,42.125 VT10.D@19.5,44.075
  Bottom Layer w0.2: v1(16.8,29.086) 16.723,29.009 16.258,29.009 16.248,29 15.751,29 15.3,29.451 15.3,29.7 15.4,29.8 15.4,29.848 19.2,33.649 v1(19.2,41.3) 19.5,41.6 19.5,50.9 v1(19.9,51.3)
DIR/AIN2: DD1.11 X1.6 | length 25.3
  Top Layer w0.2: DD1.11 13.05,21.85 13.05,20.375 14.1,19.325 v1(14.1,18.5)
  Bottom Layer w0.2: X1.6 4.15,26.84 4.15,18.781 5.631,17.3 12.9,17.3 v1(14.1,18.5)
GND: C1.2 C2.2 C3.2 C4.2 DD1.0 DD1.5 DD1.24 DD1.29 DD1.33 DD1.38 HL1.1 HL2.1 R10.1 R13.1 X1.2 X2.7 | length 0.1
  Top Layer w0.2: DD1.5 DD1.5@10.05,21.85
  other v1: 2.5,2.5 5,2.5 7.5,2.5 10,2.5 12.5,2.5 15,2.5 17.5,2.5 20,2.5 22.5,2.5 2.5,5 5,5 15,5 17.5,5 22.5,5 2.5,7.5 5,7.5 7.5,7.5 10,7.5 12.5,7.5 17.5,7.5 2.5,10 5,10 10,10 15,10 2.5,12.5 5,12.5 7.5,12.5 10,12.5 2.5,15 5,15 7.5,15 10,15 12.5,15 15,15 22.5,15 2.5,17.5 22.5,17.5 2.5,20 22.5,20 17.5,25 5,35 15,40 5,45 2.5,47.5 5,47.5 22.5,47.5 2.5,50 5,50 22.5,50 2.5,52.5 5,52.5 15,52.5 22.5,52.5 2.5,55 7.5,55 10,55 12.5,55 15,55 20,55 22.5,55 5,57.5 10,57.5 12.5,57.5 15,57.5 2.5,60 5,60 7.5,60 10,60 12.5,60 15,60 17.5,60 20,60 22.5,60
NetC1_1: C1.1 DD1.7 | length 4.6
  Top Layer w0.2: DD1.7 11,18.2 11.3,17.9 C1.1
NetC2_1: C2.1 DD1.6 | length 6.5
  Top Layer w0.2: DD1.6 10.5,16.9 11,16.4 C2.1
NetC4_1: C4.1 DD1.20 | length 1.6
  Top Layer w0.2: DD1.20 17,27.8 17.05,27.85 C4.1
NetC5_2: C5.2 DD1.3 | length 8.4
  Top Layer w0.2: C5.2 6.45,18.05 5.8,18.7 5.8,20 6.25,20.45 8.44,20.45 8.95,20.96 8.95,21.85 DD1.3
NetC6_1: C6.1 DD1.1 | length 2.3
  Top Layer w0.2: C6.1 6.25,23.2 7.55,21.9 DD1.1
NetC6_2: C6.2 DD1.2 | length 3.6
  Top Layer w0.2: C6.2 6.286,21.614 6.95,21.614 7.714,20.85 8.274,20.85 8.45,21.026 8.45,21.85 DD1.2
NetDD1_22: DD1.22 VT9.G | length 20.8
  Top Layer w0.2: DD1.22 v1(16,29.6) ; v1(20.1,45.9) 20.125,45.925 20.125,46.8 VT9.G
  Bottom Layer w0.2: v1(16,29.6) 20.1,33.7 v1(20.1,45.9)
NetDD1_23: DD1.23 R12.1 | length 9.4
  Top Layer w0.2: DD1.23 15.45,27.75 15.45,28.53 15.25,28.73 15.25,29.699 15.751,30.2 17.874,30.2 18.6,30.926 R12.1
NetDD1_25: DD1.25 R13.2 VT6.S VT10.S | length 26.6
  Top Layer w0.2: DD1.25 14.55,27.75 14.55,28.736 14.8,28.986 14.8,29.814 15.586,30.6 15.686,30.6 15.9,30.814 R13.2 15.9,31.05 17,32.15 v1(17,33.3) ; VT6.S@17.075,43.195 17.075,44.075 17.075,44.975 17.6,45.5 v1(18.5,45.5) 19.6,45.5 20.15,44.95 20.15,44.075 VT10.S@20.15,43.195
  Bottom Layer w0.2: v1(17,33.3) 17,44 v1(18.5,45.5)
NetDD1_26: DD1.26 R11.1 | length 7.1
  Top Layer w0.2: DD1.26 14,28.751 14.4,29.151 14.4,29.98 15.1,30.68 R11.1
NetDD1_27: DD1.27 VT5.G | length 20.6
  Top Layer w0.2: DD1.27 13.5,28.992 13.7,29.192 v1(13.7,29.6) ; v1(17,45.9) 17.037,45.938 17.037,46.787 VT5.G
  Bottom Layer w0.2: v1(13.7,29.6) 16.4,32.3 16.4,40.951 16.5,41.051 16.5,45.4 v1(17,45.9)
NetDD1_31: DD1.31 VT7.G | length 19.7
  Top Layer w0.2: v1(11.2,29.55) 11.2,29.051 11.45,28.801 11.45,27.75 DD1.31 ; v1(12.3,45.9) 12.325,45.925 12.325,46.8 VT7.G
  Bottom Layer w0.2: v1(11.2,29.55) 11.2,29.8 11.3,29.9 12.3,30.9 v1(12.3,45.9)
NetDD1_32: DD1.32 R9.1 | length 8.2
  Top Layer w0.2: DD1.32 10.95,27.75 10.95,28.65 10.6,29 10.6,29.798 10.951,30.15 11.674,30.15 13,31.476 R9.1
NetDD1_34: DD1.34 R10.2 VT4.S VT8.S | length 25.3
  Top Layer w0.2: VT4.S@9.425,43.195 9.425,44.075 9.425,45.025 9.9,45.5 v1(10.9,45.5) 11.8,45.5 12.3,45 12.3,44.125 12.35,44.075 VT8.S@12.35,43.195 ; DD1.34 10,30.75 R10.2 9.75,32.25 v1(10.8,33.3)
  Bottom Layer w0.2: v1(10.8,33.3) 10.85,33.35 10.85,45.45 v1(10.9,45.5)
NetDD1_35: DD1.35 R8.1 | length 7
  Top Layer w0.2: DD1.35 9.5,29.549 9.05,29.999 9.05,32.35 9.5,32.8 R8.1
NetDD1_36: DD1.36 VT3.G | length 19.5
  Top Layer w0.2: v1(8.7,29.5) 8.7,28.9 8.95,28.65 8.95,27.75 DD1.36 ; v1(9.4,45.9) 9.413,45.913 9.413,46.812 VT3.G
  Bottom Layer w0.2: v1(8.7,29.5) 8.7,29.7 9.4,30.4 v1(9.4,45.9)
NetHL1_2: HL1.2 R1.1 | length 2.8
  Top Layer w0.2: HL1.2 R1.1
NetHL2_2: HL2.2 R2.1 | length 2.8
  Top Layer w0.2: HL2.2 R2.1
NetR1_2: R1.2 VT1.D | length 3.7
  Top Layer w0.2: R1.2 8.95,10.2 9.7,10.95 VT1.D
NetR2_2: R2.2 VT2.D | length 3.7
  Top Layer w0.2: R2.2 9,4.6 9.7,5.3 VT2.D
NetR3_1: R3.1 VT1.G | length 8.7
  Top Layer w0.2: VT1.G 12.3,10 14,8.3 R3.1
NetR4_1: R4.1 VT2.G | length 12.4
  Top Layer w0.2: VT2.G 18.9,4.35 22.85,8.3 R4.1
NetR8_2: R8.2 VT4.G | length 6.3
  Top Layer w0.2: VT4.G 9.425,35.925 R8.2
NetR9_2: R9.2 VT8.G | length 6.5
  Top Layer w0.2: VT8.G 12.35,42.05 13,41.4 R9.2
NetR11_2: R11.2 VT6.G | length 7.1
  Top Layer w0.2: R11.2 15.15,35.85 15.45,36.15 15.45,38.287 17.075,39.913 VT6.G
NetR12_2: R12.2 VT10.G | length 6.9
  Top Layer w0.2: R12.2 18.65,35.85 18.95,36.15 18.95,38.5 20.15,39.7 VT10.G
nFAULT: DD1.18 R4.2 R6.1 X2.5 | length 38.5
  Top Layer w0.2: v1(18.5,22.3) 17.85,22.95 16.77,22.95 16.55,22.73 16.55,21.95 DD1.18 16.55,21.85 16.55,20.927 17.877,19.6 19.228,19.6 20.05,20.422 20.05,31.12 X2.5 ; R6.1 v1(21.2,14.3) 22.9,12.6 R4.2
  Bottom Layer w0.2: v1(18.5,22.3) 20.6,20.2 20.6,14.9 v1(21.2,14.3)
nSLEEP: DD1.8 X1.3 | length 27.9
  Top Layer w0.2: DD1.8 11.5,20.2 11.7,20 v1(11.7,19.3)
  Bottom Layer w0.2: X1.3 5.35,33.26 5.35,19.35 6.2,18.5 11.334,18.5 11.7,18.866 v1(11.7,19.3)
nSTALL: DD1.19 R3.2 R5.1 X2.6 | length 36.9
  Top Layer w0.2: DD1.19 DD1.19@17,21.408 ; v1(18.5,21.2) 17.9,21.2 17.742,21.358 17.05,21.358 DD1.19@17,21.408 ; R5.1 v1(21.2,12.3) 21.2,10.9 20.45,10.15 20.45,10.1 20.15,9.8 R3.2 ; X2.6 19.65,33.26 19.65,20.587 19.063,20 18.043,20 17,21.043 DD1.19@17,21.408
  Bottom Layer w0.2: v1(18.5,21.2) 19.85,19.85 19.85,13.65 v1(21.2,12.3)
RESET: DD1.9 X1.4 | length 27.2
  Top Layer w0.2: DD1.9 12,20.284 12.5,19.784 v1(12.5,18.6)
  Bottom Layer w0.2: X1.4 4.95,31.12 4.95,19.113 5.963,18.1 11.5,18.1 12,18.6 v1(12.5,18.6)
SPI_MISO: DD1.15 X2.2 | length 15
  Top Layer w0.2: DD1.15@14.95,21.3 15.05,21.2 15.05,20.73 17.38,18.4 19.725,18.4 21.25,19.925 21.25,24.7 X2.2 ; DD1.15@14.95,21.85 DD1.15
SPI_MOSI: DD1.17 R7.1 X2.4 | length 31.5
  Top Layer w0.2: v1(18.5,23.4) 16.654,23.4 16.05,22.796 16.05,21.95 DD1.17 16.05,21.85 16.05,20.861 17.711,19.2 19.394,19.2 20.45,20.256 20.45,28.98 X2.4 ; R7.1 v1(21.2,16.3)
  Bottom Layer w0.2: v1(18.5,23.4) 21.2,20.7 v1(21.2,16.3)
SPI_nCS: DD1.16 X2.3 | length 16.9
  Top Layer w0.2: DD1.16 15.5,20.846 17.546,18.8 19.56,18.8 20.85,20.09 20.85,26.84 X2.3
SPI_SCK: DD1.14 X2.1 | length 14.2
  Top Layer w0.2: DD1.14 14.5,20.714 17.214,18 19.891,18 21.65,19.759 21.65,22.56 X2.1
STEP/AIN1: DD1.10 X1.5 | length 26.4
  Top Layer w0.2: DD1.10 12.5,20.35 13.25,19.6 13.25,19.05 v1(13.3,19)
  Bottom Layer w0.2: X1.5 4.55,28.98 4.55,18.947 5.797,17.7 12.7,17.7 13.3,18.3 v1(13.3,19)

## Polygon pours and split planes (outlines as drawn)
GND on Bottom Layer (solid, pour order 42): 0,62.5 25,62.5 25,0 0,0
no net on Bottom Layer "Bottom Layer-No Net" (solid, pour order 24): 0,64
+24V on Bottom Layer "+24V_L02_P000" (solid, pour order 0): 0.7,42.9 0.7,39.7 3.5,39.7 5.7,37.5 5.7,19.5 6.4,18.8 7.8,18.8 7.8,20.4 7.2,20.4 7.2,39.6 3.9,42.9
GND on Top Layer (solid, pour order 44): 0,62.5 25,62.5 25,0 0,0
BOUT2 on Top Layer "Top Layer-BOUT2" (solid, pour order 10): 19.7,44.8 18.3,44.8 18.1,44.6 18.1,41.4 18.7,40.8 19.7,40.8
+3,3V on Top Layer "Top Layer-+3,3V" (solid, pour order 22): 18.8,17.4 18.8,11.1 17.2,11.1 16.4,11.9 16.4,16.525 17.1,17.4
+24V on Top Layer "Top Layer-+24V" (solid, pour order 20): 19.8,50 18.4,50 18,49.6 18,46.2 18.1,46.1 19.8,46.1
+24V on Top Layer "Top Layer-+24V 1" (solid, pour order 18): 16.6,49.4 14.7,49.4 14.3,49 14.3,46.4 14.7,46 16.6,46
+24V on Top Layer "Top Layer-+24V 2" (solid, pour order 16): 11.9,49.9 10.4,49.9 10.2,49.7 10.2,46.3 10.5,46 11.9,46
AOUT2 on Top Layer "Top Layer-AOUT2" (solid, pour order 6): 11.9,44.7 10.5,44.7 10.2,44.4 10.2,41.3 10.8,40.7 11.9,40.7
+24V on Top Layer "Top Layer-+24V 3" (solid, pour order 12): 9,49.4 7.2,49.4 6.6,48.8 6.6,46.8 7.2,46.2 9,46.2
BOUT1 on Top Layer "Top Layer-BOUT1" (solid, pour order 8): 16.6,40.8 15.5,40.8 14.9,41.4 14.9,44.6 15.2,44.9 16.6,44.9
AOUT1 on Top Layer "Top Layer-AOUT1" (solid, pour order 4): 9,40.7 9,44.7 7.6,44.7 7.3,44.4 7.3,41.3 7.9,40.7
+24V on Top Layer "+24V_L01_P002" (solid, pour order 2): 6.05,18.7 9.9,18.7 10.2,19 10.2,20.6 9.8,21 9.8,22.8 9.2,22.8 9.2,20.7 8.95,20.45 6.05,20.45

## Silkscreen, mask and mechanical layers (free items; w line width, h text height)
Top Overlay:
  text ".designation" at 4.5,0.5 h2
Bottom Overlay:
  text ".pcb_dec_number" at 20.5,0.5 h2
Board:
  the board outline again, w0.1
Assembly Notes (Mech5):
  text "'.title'" at 26.5,57.2 h2
  text "'.project'_'.pcb_dec_number'['.Pcb_File_Name_No_Path']" at 26.5,53.4 h2